# EAGLE board levitator_v25e9 (2023_05_06 11_59_24 UTC) (EAGLE 9.6.2), part 1 of 2
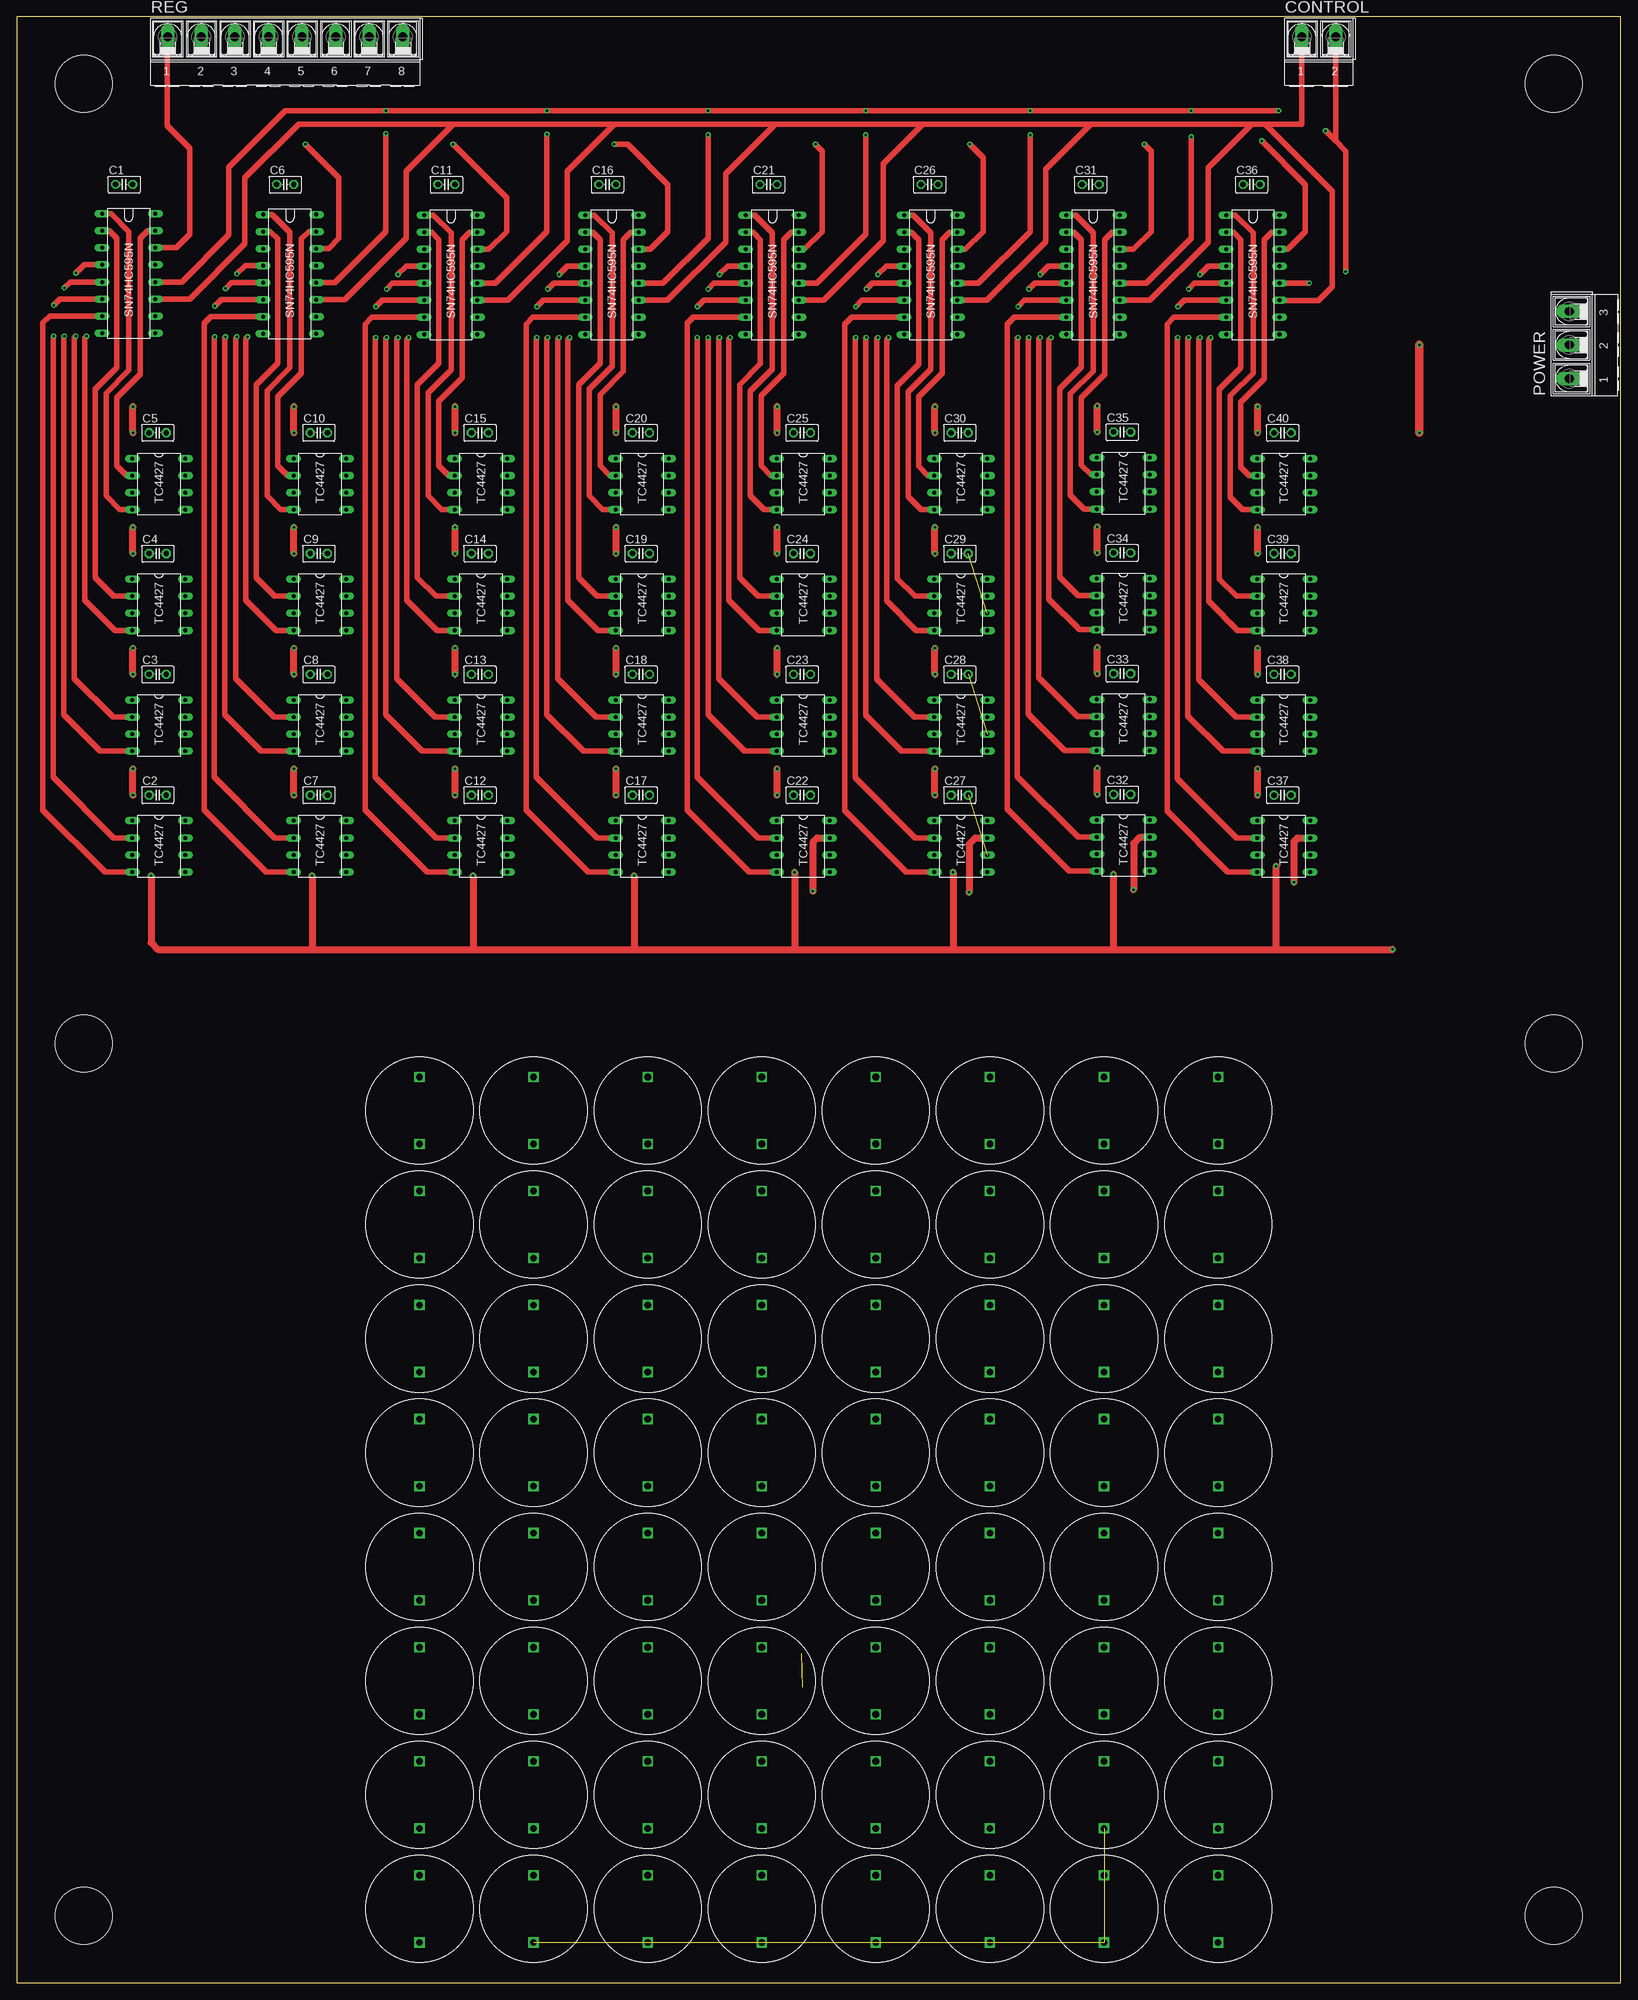
[diagram p0: board, top side]
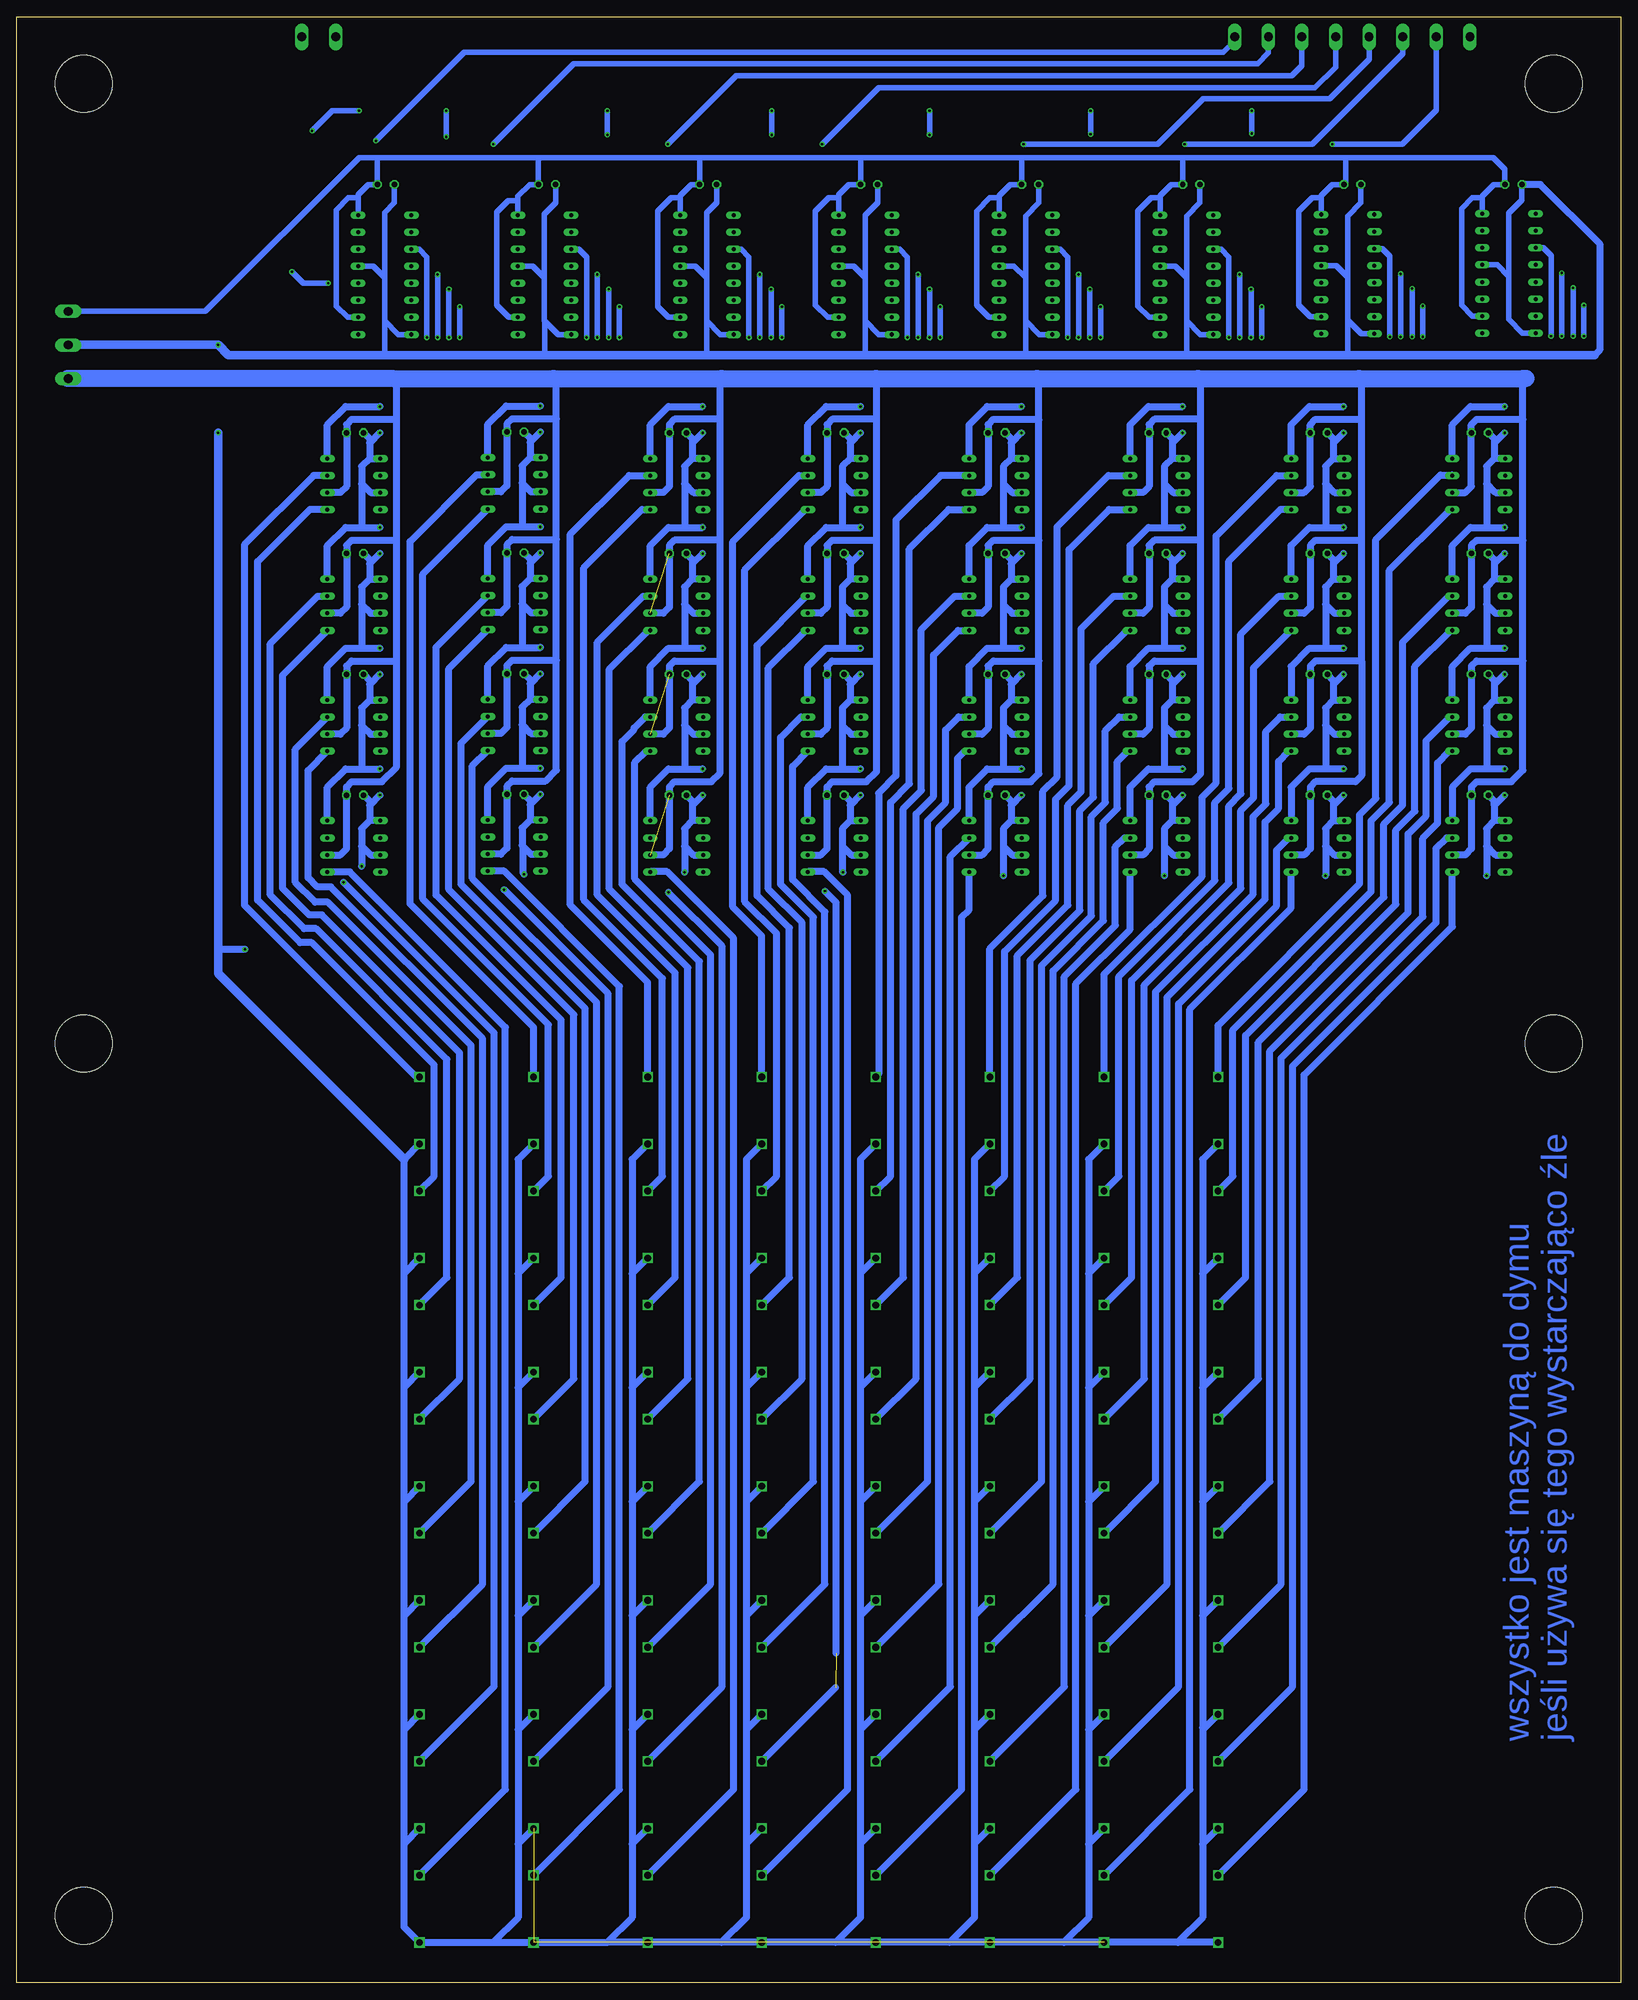
[diagram p1: board, bottom side, seen from below]

Size 239 x 293 mm. Coordinates in mm from the lower left corner, seen from the top.
Outline: 0,0 239,0 239,293 0,293 0,0
Copper layers (1*16): Top 0.035mm / dielectric 1.5mm / Bottom 0.035mm
Design rules "default": minimum track width 6mil, minimum drill 0.35mm, track to track 6mil, track to pad 6mil, pad to pad 6mil, via to via 6mil, smd to smd 6mil, copper to edge 40mil, drill to drill 6mil, minimum pad ring 10mil, minimum via ring 8mil, stop-mask expansion 4mil, vias tented up to drill 0mil, thermal gap 10mil
Holes 8.5 mm at 10,10 229,10 10,140 229,140 10,283 229,283

## Footprints (pad centres in the part's own frame; a part is rotated, then mirrored left to right if it is on the bottom)
C025-025X050 = drill 0.813 octagon: 1 -1.27,0; 2 1.27,0
AK500/2-H = drill 1.321 long: 1 -2.515,0; 2 2.515,0
AK500/3-H = drill 1.321 long: 1 -5.004,0; 2 0,0; 3 5.004,0
AK500/8-H = drill 1.321 long: 1 -17.526,0; 2 -12.497,0; 3 -7.518,0; 4 -2.489,0; 5 2.489,0; 6 7.518,0; 7 12.497,0; 8 17.526,0
TC4427 = drill 0.6 long: 1 0.826,-0.762; 2 3.365,-0.762; 3 5.905,-0.762; 4 8.445,-0.762; 5 8.445,7.112; 6 5.905,7.112; 7 3.365,7.112; 8 0.826,7.112
SN74HC595N = drill 0.6 long: 1 0.762,-0.794; 2 3.302,-0.794; 3 5.842,-0.794; 4 8.382,-0.794; 5 10.922,-0.794; 6 13.462,-0.794; 7 16.002,-0.794; 8 18.542,-0.794; 9 18.542,7.144; 10 16.002,7.144; 11 13.462,7.144; 12 10.922,7.144; 13 8.382,7.144; 14 5.842,7.144; 15 3.302,7.144; 16 0.762,7.144
TRANSDUSTER_16MM_40KHZ = drill 1 square: 1 0,-5; 2 0,5

## Placement (x,y rotation side)
C1  0.1 uF  [C025-025X050]  16,268 0 top
C2  0.1 uF  [C025-025X050]  21,177 0 top
C3  0.1 uF  [C025-025X050]  21,195 0 top
C4  0.1 uF  [C025-025X050]  21,213 0 top
C5  0.1 uF  [C025-025X050]  21,231 0 top
C6  0.1 uF  [C025-025X050]  40,268 0 top
C7  0.1 uF  [C025-025X050]  45,177 0 top
C8  0.1 uF  [C025-025X050]  45,195 0 top
C9  0.1 uF  [C025-025X050]  45,213 0 top
C10  0.1 uF  [C025-025X050]  45,231 0 top
C11  0.1 uF  [C025-025X050]  64,268 0 top
C12  0.1 uF  [C025-025X050]  69,177 0 top
C13  0.1 uF  [C025-025X050]  69,195 0 top
C14  0.1 uF  [C025-025X050]  69,213 0 top
C15  0.1 uF  [C025-025X050]  69,231 0 top
C16  0.1 uF  [C025-025X050]  88,268 0 top
C17  0.1 uF  [C025-025X050]  93,177 0 top
C18  0.1 uF  [C025-025X050]  93,195 0 top
C19  0.1 uF  [C025-025X050]  93,213 0 top
C20  0.1 uF  [C025-025X050]  93,231 0 top
C21  0.1 uF  [C025-025X050]  112,268 0 top
C22  0.1 uF  [C025-025X050]  117,177 0 top
C23  0.1 uF  [C025-025X050]  117,195 0 top
C24  0.1 uF  [C025-025X050]  117,213 0 top
C25  0.1 uF  [C025-025X050]  117,231 0 top
C26  0.1 uF  [C025-025X050]  136,268 0 top
C27  0.1 uF  [C025-025X050]  140.5,177 0 top
C28  0.1 uF  [C025-025X050]  140.5,195 0 top
C29  0.1 uF  [C025-025X050]  140.5,213 0 top
C30  0.1 uF  [C025-025X050]  140.5,231 0 top
C31  0.1 uF  [C025-025X050]  160,268 0 top
C32  0.1 uF  [C025-025X050]  164.7,177.1 0 top
C33  0.1 uF  [C025-025X050]  164.7,195.1 0 top
C34  0.1 uF  [C025-025X050]  164.7,213.1 0 top
C35  0.1 uF  [C025-025X050]  164.7,231.1 0 top
C36  0.1 uF  [C025-025X050]  184,268 0 top
C37  0.1 uF  [C025-025X050]  188.6,177 0 top
C38  0.1 uF  [C025-025X050]  188.6,195 0 top
C39  0.1 uF  [C025-025X050]  188.6,213 0 top
C40  0.1 uF  [C025-025X050]  188.6,231 0 top
CONTROL  [AK500/2-H]  194,290 0 top
POWER  [AK500/3-H]  231.34,244.09 90 top
REG  [AK500/8-H]  40,290 0 top
U$1  TC4427  [TC4427]  18,228 270 top
U$2  SN74HC595N  [SN74HC595N]  13.5,264.4 270 top
U$3  TC4427  [TC4427]  18,210 270 top
U$4  TC4427  [TC4427]  18,192 270 top
U$5  TC4427  [TC4427]  18,174 270 top
U$6  TRANSDUSTER_16MM_40KHZ  [TRANSDUSTER_16MM_40KHZ]  60,130 0 top
U$7  TRANSDUSTER_16MM_40KHZ  [TRANSDUSTER_16MM_40KHZ]  60,113 0 top
U$8  TRANSDUSTER_16MM_40KHZ  [TRANSDUSTER_16MM_40KHZ]  60,96 0 top
U$9  TRANSDUSTER_16MM_40KHZ  [TRANSDUSTER_16MM_40KHZ]  60,79 0 top
U$10  TRANSDUSTER_16MM_40KHZ  [TRANSDUSTER_16MM_40KHZ]  60,62 0 top
U$11  TRANSDUSTER_16MM_40KHZ  [TRANSDUSTER_16MM_40KHZ]  60,45 0 top
U$12  TRANSDUSTER_16MM_40KHZ  [TRANSDUSTER_16MM_40KHZ]  60,28 0 top
U$13  TRANSDUSTER_16MM_40KHZ  [TRANSDUSTER_16MM_40KHZ]  60,11 0 top
U$14  TC4427  [TC4427]  42,228 270 top
U$15  SN74HC595N  [SN74HC595N]  37.5,264.3 270 top
U$16  TC4427  [TC4427]  42,210 270 top
U$17  TC4427  [TC4427]  42,192 270 top
U$18  TC4427  [TC4427]  42,174 270 top
U$19  TRANSDUSTER_16MM_40KHZ  [TRANSDUSTER_16MM_40KHZ]  77,130 0 top
U$20  TRANSDUSTER_16MM_40KHZ  [TRANSDUSTER_16MM_40KHZ]  77,113 0 top
U$21  TRANSDUSTER_16MM_40KHZ  [TRANSDUSTER_16MM_40KHZ]  77,96 0 top
U$22  TRANSDUSTER_16MM_40KHZ  [TRANSDUSTER_16MM_40KHZ]  77,79 0 top
U$23  TRANSDUSTER_16MM_40KHZ  [TRANSDUSTER_16MM_40KHZ]  77,62 0 top
U$24  TRANSDUSTER_16MM_40KHZ  [TRANSDUSTER_16MM_40KHZ]  77,45 0 top
U$25  TRANSDUSTER_16MM_40KHZ  [TRANSDUSTER_16MM_40KHZ]  77,28 0 top
U$26  TRANSDUSTER_16MM_40KHZ  [TRANSDUSTER_16MM_40KHZ]  77,11 0 top
U$27  TC4427  [TC4427]  66,228 270 top
U$28  SN74HC595N  [SN74HC595N]  61.5,264.2 270 top
U$29  TC4427  [TC4427]  66,210 270 top
U$30  TC4427  [TC4427]  66,192 270 top
U$31  TC4427  [TC4427]  66,174 270 top
U$32  TRANSDUSTER_16MM_40KHZ  [TRANSDUSTER_16MM_40KHZ]  94,130 0 top
U$33  TRANSDUSTER_16MM_40KHZ  [TRANSDUSTER_16MM_40KHZ]  94,113 0 top
U$34  TRANSDUSTER_16MM_40KHZ  [TRANSDUSTER_16MM_40KHZ]  94,96 0 top
U$35  TRANSDUSTER_16MM_40KHZ  [TRANSDUSTER_16MM_40KHZ]  94,79 0 top
U$36  TRANSDUSTER_16MM_40KHZ  [TRANSDUSTER_16MM_40KHZ]  94,62 0 top
U$37  TRANSDUSTER_16MM_40KHZ  [TRANSDUSTER_16MM_40KHZ]  94,45 0 top
U$38  TRANSDUSTER_16MM_40KHZ  [TRANSDUSTER_16MM_40KHZ]  94,28 0 top
U$39  TRANSDUSTER_16MM_40KHZ  [TRANSDUSTER_16MM_40KHZ]  94,11 0 top
U$40  TC4427  [TC4427]  90,228 270 top
U$41  SN74HC595N  [SN74HC595N]  85.5,264.2 270 top
U$42  TC4427  [TC4427]  90,210 270 top
U$43  TC4427  [TC4427]  90,192 270 top
U$44  TC4427  [TC4427]  90,174 270 top
U$45  TRANSDUSTER_16MM_40KHZ  [TRANSDUSTER_16MM_40KHZ]  111,130 0 top
U$46  TRANSDUSTER_16MM_40KHZ  [TRANSDUSTER_16MM_40KHZ]  111,113 0 top
U$47  TRANSDUSTER_16MM_40KHZ  [TRANSDUSTER_16MM_40KHZ]  111,96 0 top
U$48  TRANSDUSTER_16MM_40KHZ  [TRANSDUSTER_16MM_40KHZ]  111,79 0 top
U$49  TRANSDUSTER_16MM_40KHZ  [TRANSDUSTER_16MM_40KHZ]  111,62 0 top
U$50  TRANSDUSTER_16MM_40KHZ  [TRANSDUSTER_16MM_40KHZ]  111,45 0 top
U$51  TRANSDUSTER_16MM_40KHZ  [TRANSDUSTER_16MM_40KHZ]  111,28 0 top
U$52  TRANSDUSTER_16MM_40KHZ  [TRANSDUSTER_16MM_40KHZ]  111,11 0 top
U$53  TC4427  [TC4427]  114,228 270 top
U$54  SN74HC595N  [SN74HC595N]  109.4,264.2 270 top
U$55  TC4427  [TC4427]  114,210 270 top
U$56  TC4427  [TC4427]  114,192 270 top
U$57  TC4427  [TC4427]  114,174 270 top
U$58  TRANSDUSTER_16MM_40KHZ  [TRANSDUSTER_16MM_40KHZ]  128,130 0 top
U$59  TRANSDUSTER_16MM_40KHZ  [TRANSDUSTER_16MM_40KHZ]  128,113 0 top
U$60  TRANSDUSTER_16MM_40KHZ  [TRANSDUSTER_16MM_40KHZ]  128,96 0 top
U$61  TRANSDUSTER_16MM_40KHZ  [TRANSDUSTER_16MM_40KHZ]  128,79 0 top
U$62  TRANSDUSTER_16MM_40KHZ  [TRANSDUSTER_16MM_40KHZ]  128,62 0 top
U$63  TRANSDUSTER_16MM_40KHZ  [TRANSDUSTER_16MM_40KHZ]  128,45 0 top
U$64  TRANSDUSTER_16MM_40KHZ  [TRANSDUSTER_16MM_40KHZ]  128,28 0 top
U$65  TRANSDUSTER_16MM_40KHZ  [TRANSDUSTER_16MM_40KHZ]  128,11 0 top
U$66  TC4427  [TC4427]  137.5,228 270 top
U$67  SN74HC595N  [SN74HC595N]  133,264.2 270 top
U$68  TC4427  [TC4427]  137.5,210 270 top
U$69  TC4427  [TC4427]  137.5,192 270 top
U$70  TC4427  [TC4427]  137.5,174 270 top
U$71  TRANSDUSTER_16MM_40KHZ  [TRANSDUSTER_16MM_40KHZ]  145,130 0 top
U$72  TRANSDUSTER_16MM_40KHZ  [TRANSDUSTER_16MM_40KHZ]  145,113 0 top
U$73  TRANSDUSTER_16MM_40KHZ  [TRANSDUSTER_16MM_40KHZ]  145,96 0 top
U$74  TRANSDUSTER_16MM_40KHZ  [TRANSDUSTER_16MM_40KHZ]  145,79 0 top
U$75  TRANSDUSTER_16MM_40KHZ  [TRANSDUSTER_16MM_40KHZ]  145,62 0 top
U$76  TRANSDUSTER_16MM_40KHZ  [TRANSDUSTER_16MM_40KHZ]  145,45 0 top
U$77  TRANSDUSTER_16MM_40KHZ  [TRANSDUSTER_16MM_40KHZ]  145,28 0 top
U$78  TRANSDUSTER_16MM_40KHZ  [TRANSDUSTER_16MM_40KHZ]  145,11 0 top
U$79  TC4427  [TC4427]  161.7,228.1 270 top
U$80  SN74HC595N  [SN74HC595N]  157.2,264.2 270 top
U$81  TC4427  [TC4427]  161.7,210.1 270 top
U$82  TC4427  [TC4427]  161.7,192.1 270 top
U$83  TC4427  [TC4427]  161.7,174.1 270 top
U$84  TRANSDUSTER_16MM_40KHZ  [TRANSDUSTER_16MM_40KHZ]  162,130 0 top
U$85  TRANSDUSTER_16MM_40KHZ  [TRANSDUSTER_16MM_40KHZ]  162,113 0 top
U$86  TRANSDUSTER_16MM_40KHZ  [TRANSDUSTER_16MM_40KHZ]  162,96 0 top
U$87  TRANSDUSTER_16MM_40KHZ  [TRANSDUSTER_16MM_40KHZ]  162,79 0 top
U$88  TRANSDUSTER_16MM_40KHZ  [TRANSDUSTER_16MM_40KHZ]  162,62 0 top
U$89  TRANSDUSTER_16MM_40KHZ  [TRANSDUSTER_16MM_40KHZ]  162,45 0 top
U$90  TRANSDUSTER_16MM_40KHZ  [TRANSDUSTER_16MM_40KHZ]  162,28 0 top
U$91  TRANSDUSTER_16MM_40KHZ  [TRANSDUSTER_16MM_40KHZ]  162,11 0 top
U$92  TC4427  [TC4427]  185.6,228 270 top
U$93  SN74HC595N  [SN74HC595N]  181,264.2 270 top
U$94  TC4427  [TC4427]  185.6,210 270 top
U$95  TC4427  [TC4427]  185.6,192 270 top
U$96  TC4427  [TC4427]  185.6,174 270 top
U$97  TRANSDUSTER_16MM_40KHZ  [TRANSDUSTER_16MM_40KHZ]  179,130 0 top
U$98  TRANSDUSTER_16MM_40KHZ  [TRANSDUSTER_16MM_40KHZ]  179,113 0 top
U$99  TRANSDUSTER_16MM_40KHZ  [TRANSDUSTER_16MM_40KHZ]  179,96 0 top
U$100  TRANSDUSTER_16MM_40KHZ  [TRANSDUSTER_16MM_40KHZ]  179,79 0 top
U$101  TRANSDUSTER_16MM_40KHZ  [TRANSDUSTER_16MM_40KHZ]  179,62 0 top
U$102  TRANSDUSTER_16MM_40KHZ  [TRANSDUSTER_16MM_40KHZ]  179,45 0 top
U$103  TRANSDUSTER_16MM_40KHZ  [TRANSDUSTER_16MM_40KHZ]  179,28 0 top
U$104  TRANSDUSTER_16MM_40KHZ  [TRANSDUSTER_16MM_40KHZ]  179,11 0 top

## Library data of the parts
C1-C40 = rcl; SPICEPREFIX: C
CONTROL POWER REG = con-ptr500; OC_FARNELL: unknown; OC_NEWARK: unknown
U$1-U$104 = TC4427

## Nets
GND: C1.1 C2.1 C3.1 C4.1 C5.1 C6.1 C7.1 C8.1 C9.1 C10.1 C11.1 C12.1 C13.1 C14.1 C15.1 C16.1 C17.1 C18.1 C19.1 C20.1 C21.1 C22.1 C23.1 C24.1 C25.1 C26.1 C27.1 C28.1 C29.1 C30.1 C31.1 C32.1 C33.1 C34.1 C35.1 C36.1 C37.1 C38.1 C39.1 C40.1 POWER.2 U$1.1 U$1.3 U$1.8 U$2.8 U$2.13 U$3.1 U$3.3 U$3.8 U$4.1 U$4.3 U$4.8 U$5.1 U$5.3 U$5.8 U$6.1 U$7.1 U$8.1 U$9.1 U$10.1 U$11.1 U$12.1 U$13.1 U$14.1 U$14.3 U$14.8 U$15.8 U$15.13 U$16.1 U$16.3 U$16.8 U$17.1 U$17.3 U$17.8 U$18.1 U$18.3 U$18.8 U$19.1 U$20.1 U$21.1 U$22.1 U$23.1 U$24.1 U$25.1 U$26.1 U$27.1 U$27.3 U$27.8 U$28.8 U$28.13 U$29.1 U$29.3 U$29.8 U$30.1 U$30.3 U$30.8 U$31.1 U$31.3 U$31.8 U$32.1 U$33.1 U$34.1 U$35.1 U$36.1 U$37.1 U$38.1 U$39.1 U$40.1 U$40.3 U$40.8 U$41.8 U$41.13 U$42.1 U$42.3 U$42.8 U$43.1 U$43.3 U$43.8 U$44.1 U$44.3 U$44.8 U$45.1 U$46.1 U$47.1 U$48.1 U$49.1 U$50.1 U$51.1 U$52.1 U$53.1 U$53.3 U$53.8 U$54.8 U$54.13 U$55.1 U$55.3 U$55.8 U$56.1 U$56.3 U$56.8 U$57.1 U$57.3 U$57.8 U$58.1 U$59.1 U$60.1 U$61.1 U$62.1 U$63.1 U$64.1 U$65.1 U$66.1 U$66.3 U$66.8 U$67.8 U$67.13 U$68.1 U$68.3 U$68.8 U$69.1 U$69.3 U$69.8 U$70.1 U$70.3 U$70.8 U$71.1 U$72.1 U$73.1 U$74.1 U$75.1 U$76.1 U$77.1 U$78.1 U$79.1 U$79.3 U$79.8 U$80.8 U$80.13 U$81.1 U$81.3 U$81.8 U$82.1 U$82.3 U$82.8 U$83.1 U$83.3 U$83.8 U$84.1 U$85.1 U$86.1 U$87.1 U$88.1 U$89.1 U$90.1 U$91.1 U$92.1 U$92.3 U$92.8 U$93.8 U$93.13 U$94.1 U$94.3 U$94.8 U$95.1 U$95.3 U$95.8 U$96.1 U$96.3 U$96.8 U$97.1 U$98.1 U$99.1 U$100.1 U$101.1 U$102.1 U$103.1 U$104.1
N$1: U$1.2 U$2.15
N$2: U$1.4 U$2.1
N$3: U$2.2 U$3.2
N$4: U$2.3 U$3.4
N$5: U$2.4 U$4.2
N$6: U$2.5 U$4.4
N$7: U$2.6 U$5.2
N$8: U$2.7 U$5.4
N$9: U$1.7 U$6.2
N$10: U$1.5 U$7.2
N$11: U$3.7 U$8.2
N$12: U$3.5 U$9.2
N$13: U$4.7 U$10.2
N$14: U$4.5 U$11.2
N$15: U$5.7 U$12.2
N$16: U$5.5 U$13.2
N$17: REG.1 U$2.14
N$18: U$79.2 U$80.15
N$19: U$79.4 U$80.1
N$20: U$14.2 U$15.15
N$21: U$14.4 U$15.1
N$22: U$15.2 U$16.2
N$23: U$15.3 U$16.4
N$24: U$15.4 U$17.2
N$25: U$15.5 U$17.4
N$26: U$15.6 U$18.2
N$27: U$15.7 U$18.4
N$28: U$14.7 U$19.2
N$29: U$14.5 U$20.2
N$30: U$16.7 U$21.2
N$31: U$16.5 U$22.2
N$32: U$17.7 U$23.2
N$33: U$17.5 U$24.2
N$34: U$18.7 U$25.2
N$35: U$18.5 U$26.2
N$36: REG.2 U$15.14
N$39: U$27.2 U$28.15
N$40: U$27.4 U$28.1
N$41: U$28.2 U$29.2
N$42: U$28.3 U$29.4
N$43: U$28.4 U$30.2
N$44: U$28.5 U$30.4
N$45: U$28.6 U$31.2
N$46: U$28.7 U$31.4
N$47: U$27.7 U$32.2
N$48: U$27.5 U$33.2
N$49: U$29.7 U$34.2
N$50: U$29.5 U$35.2
N$51: U$30.7 U$36.2
N$52: U$30.5 U$37.2
N$53: U$31.7 U$38.2
N$54: U$31.5 U$39.2
N$55: REG.3 U$28.14
N$56: U$80.2 U$81.2
N$57: CONTROL.1 U$2.11 U$15.11 U$28.11 U$41.11 U$54.11 U$67.11 U$80.11 U$93.11
N$58: CONTROL.2 U$2.12 U$15.12 U$28.12 U$41.12 U$54.12 U$67.12 U$80.12 U$93.12
N$59: U$40.2 U$41.15
N$60: U$40.4 U$41.1
N$61: U$41.2 U$42.2
N$62: U$41.3 U$42.4
N$63: U$41.4 U$43.2
N$64: U$41.5 U$43.4
N$65: U$41.6 U$44.2
N$66: U$41.7 U$44.4
N$67: U$40.7 U$45.2
N$68: U$40.5 U$46.2
N$69: U$42.7 U$47.2
N$70: U$42.5 U$48.2
N$71: U$43.7 U$49.2
N$72: U$43.5 U$50.2
N$73: U$44.7 U$51.2
N$74: U$44.5 U$52.2
N$75: REG.4 U$41.14
N$76: U$80.3 U$81.4
N$79: U$53.2 U$54.15
N$80: U$53.4 U$54.1
N$81: U$54.2 U$55.2
N$82: U$54.3 U$55.4
N$83: U$54.4 U$56.2
N$84: U$54.5 U$56.4
N$85: U$54.6 U$57.2
N$86: U$54.7 U$57.4
N$87: U$53.7 U$58.2
N$88: U$53.5 U$59.2
N$89: U$55.7 U$60.2
N$90: U$55.5 U$61.2
N$91: U$56.7 U$62.2
N$92: U$56.5 U$63.2
N$93: U$57.7 U$64.2
N$94: U$57.5 U$65.2
N$95: REG.5 U$54.14
N$98: U$66.2 U$67.15
N$99: U$66.4 U$67.1
N$100: U$67.2 U$68.2
N$101: U$67.3 U$68.4
N$102: U$67.4 U$69.2
N$103: U$67.5 U$69.4
N$104: U$67.6 U$70.2
N$105: U$67.7 U$70.4
N$106: U$66.7 U$71.2
N$107: U$66.5 U$72.2
N$108: U$68.7 U$73.2
N$109: U$68.5 U$74.2
N$110: U$69.7 U$75.2
N$111: U$69.5 U$76.2
N$112: U$70.7 U$77.2
N$113: U$70.5 U$78.2
N$114: REG.6 U$67.14
N$115: U$80.4 U$82.2
N$116: U$80.5 U$82.4
N$117: U$80.6 U$83.2
N$118: U$80.7 U$83.4
N$119: U$79.7 U$84.2
N$120: U$79.5 U$85.2
N$121: U$81.7 U$86.2
N$122: U$81.5 U$87.2
N$123: U$82.7 U$88.2
N$124: U$82.5 U$89.2
N$125: U$83.7 U$90.2
N$126: U$83.5 U$91.2
N$127: REG.7 U$80.14
N$130: U$92.2 U$93.15
N$131: U$92.4 U$93.1
N$132: U$93.2 U$94.2
N$133: U$93.3 U$94.4
N$134: U$93.4 U$95.2
N$135: U$93.5 U$95.4
N$136: U$93.6 U$96.2
N$137: U$93.7 U$96.4
N$138: U$92.7 U$97.2
N$139: U$92.5 U$98.2
N$140: U$94.7 U$99.2
N$141: U$94.5 U$100.2
N$142: U$95.7 U$101.2
N$143: U$95.5 U$102.2
N$144: U$96.7 U$103.2
N$145: U$96.5 U$104.2
N$146: REG.8 U$93.14
VCC: C1.2 C6.2 C11.2 C16.2 C21.2 C26.2 C31.2 C36.2 POWER.3 U$2.10 U$2.16 U$15.10 U$15.16 U$28.10 U$28.16 U$41.10 U$41.16 U$54.10 U$54.16 U$67.10 U$67.16 U$80.10 U$80.16 U$93.10 U$93.16
VDD: C2.2 C3.2 C4.2 C5.2 C7.2 C8.2 C9.2 C10.2 C12.2 C13.2 C14.2 C15.2 C17.2 C18.2 C19.2 C20.2 C22.2 C23.2 C24.2 C25.2 C27.2 C28.2 C29.2 C30.2 C32.2 C33.2 C34.2 C35.2 C37.2 C38.2 C39.2 C40.2 POWER.1 U$1.6 U$3.6 U$4.6 U$5.6 U$14.6 U$16.6 U$17.6 U$18.6 U$27.6 U$29.6 U$30.6 U$31.6 U$40.6 U$42.6 U$43.6 U$44.6 U$53.6 U$55.6 U$56.6 U$57.6 U$66.6 U$68.6 U$69.6 U$70.6 U$79.6 U$81.6 U$82.6 U$83.6 U$92.6 U$94.6 U$95.6 U$96.6